# EAGLE board beeshield (EAGLE 6.5.0)
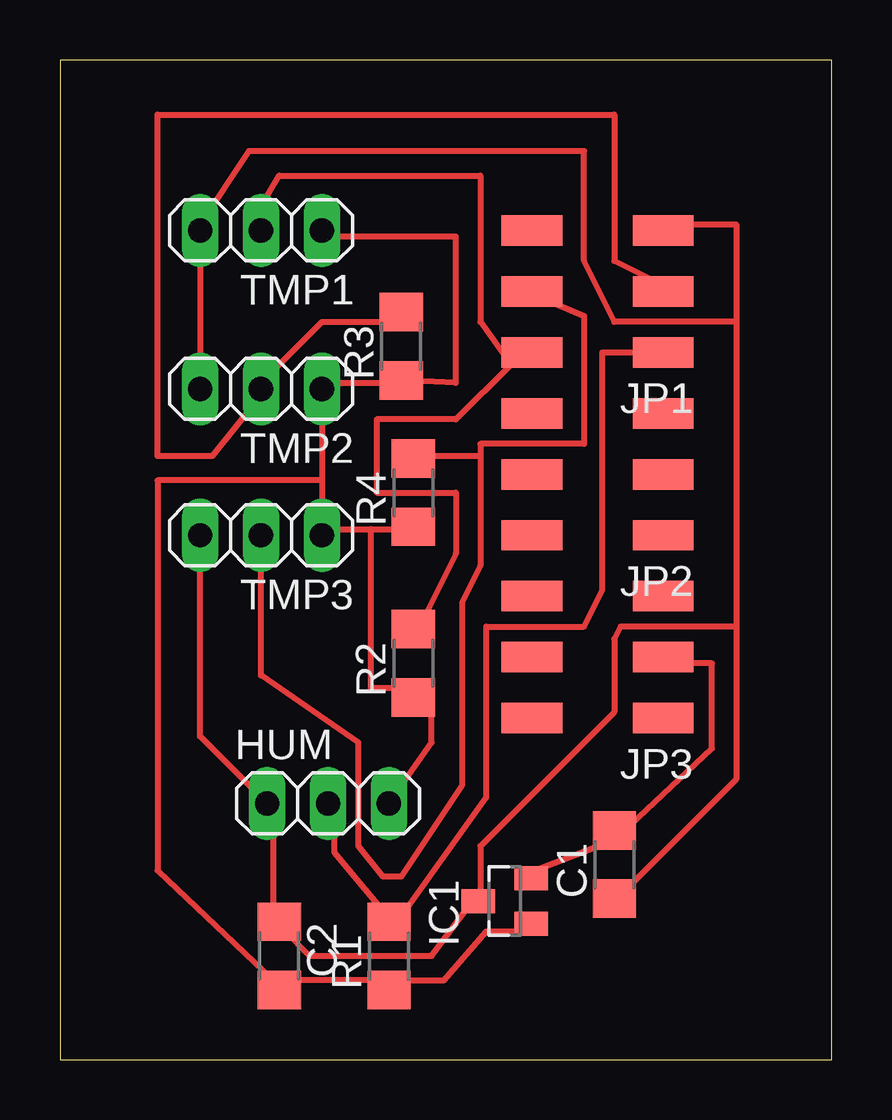
[diagram p0: board, top side]

Size 32.18 x 41.65 mm. Coordinates in mm from the lower left corner, seen from the top.
Outline: 0,0 32.18,0 32.18,41.65 0,41.65 0,0
Copper layers (1*16): Top 0.035mm / dielectric 1.5mm / Bottom 0.035mm
Design rules "default *": minimum track width 10mil, minimum drill 24mil, track to track 20mil, track to pad 8mil, pad to pad 8mil, via to via 8mil, smd to smd 8mil, copper to edge 40mil, drill to drill 8mil, minimum pad ring 10mil, minimum via ring 8mil, stop-mask expansion 4mil, vias tented up to drill 0mil, thermal gap 10mil

## Footprints (pad centres in the part's own frame; a part is rotated, then mirrored left to right if it is on the bottom)
1206 = smd 1.6 x 1.803: 1 -1.422,0; 2 1.422,0
1X03 = drill 1.016 long: 1 -2.54,0; 2 0,0; 3 2.54,0
SOT23 = smd 1 x 1.4: 1 -0.95,-1.1; 2 0.95,-1.1; 3 0,1.1
2X03SMD = smd 2.54 x 1.27: 1 -2.54,2.54; 2 2.92,2.54; 3 -2.54,0; 4 2.92,0; 5 -2.54,-2.54; 6 2.92,-2.54

## Placement (x,y rotation side)
C1  [1206]  23.11,8.13 90 top
C2  [1206]  9.14,4.32 270 top
HUM  [1X03]  11.18,10.67 0 top
IC1  [SOT23]  18.54,6.6 90 top
JP1  [2X03SMD]  22.61,32 180 top
JP2  [2X03SMD]  22.61,24.38 180 top
JP3  [2X03SMD]  22.61,16.76 180 top
R1  10k  [1206]  13.72,4.32 90 top
R2  4k7  [1206]  14.73,16.51 90 top
R3  4k7  [1206]  14.22,29.72 90 top
R4  4k7  [1206]  14.73,23.62 90 top
TMP1  [1X03]  8.38,34.54 180 top
TMP2  [1X03]  8.38,27.94 180 top
TMP3  [1X03]  8.38,21.84 180 top

## Library data of the parts
C1 C2 R1-R4 = FAB_Hello
HUM TMP1-TMP3 = pinhead
IC1 JP1-JP3 = fab

## Nets
GND: C1.1 C2.1 HUM.1 IC1.3 JP1.5 TMP1.3 TMP2.3 TMP3.3
IO0: HUM.2 JP1.1 R1.2
IO1: JP1.2 R2.2 TMP1.2
IO2: JP1.3 R3.2 TMP2.2
IO3: JP1.4 R4.2 TMP3.2
VBAT1: C1.2 IC1.2 JP3.3
VCC: C2.2 HUM.3 IC1.1 R1.1 R2.1 R3.1 R4.1 TMP1.1 TMP2.1 TMP3.1

## Tracks (layer width: path | path; a pad name or v marks a point on that pad's centre or on a via)
GND
  Top 0.254: TMP3.3 5.84,13.46 HUM.1 8.89,10.41 8.89,5.84 C2.1 9.4,5.33 10.41,4.32 15.49,4.32 17.02,6.35 IC1.3 17.53,6.86 17.53,8.89 23.11,14.48 23.11,17.53 23.37,18.03 28.19,18.03 | TMP2.3 TMP1.3 5.84,34.8 7.87,37.85 21.84,37.85 21.84,33.27 23.11,30.73 28.19,30.73 | 28.19,30.73 28.19,34.8 25.15,34.8 JP1.5 | 28.19,30.73 28.19,18.03 | 28.19,18.03 28.19,11.68 23.11,6.6 C1.1
IO0
  Top 0.254: 13.97,5.59 13.46,5.84 R1.2 13.97,5.59 | 13.97,5.59 11.43,8.64 11.43,10.41 HUM.2 | 13.97,5.59 17.78,10.92 17.78,18.03 21.84,18.03 22.61,19.56 22.61,29.46 JP1.1 25.15,29.21
IO1
  Top 0.254: 18.8,28.96 19.56,29.21 JP1.2 | 18.8,28.96 16.51,26.67 13.21,26.67 13.21,23.62 16.51,23.62 16.51,21.08 14.99,18.03 R2.2 14.73,17.78 | TMP1.2 8.38,35.56 9.14,36.83 17.53,36.83 17.53,30.73 18.8,28.96
IO2
  Top 0.254: R3.2 14.22,30.73 10.92,30.73 8.38,28.19 TMP2.2 8.38,27.69 6.35,25.15 4.06,25.15 4.06,39.37 23.11,39.37 23.11,33.27 25.15,32.26 JP1.3
IO3
  Top 0.254: 17.53,25.15 14.73,25.15 R4.2 | 17.53,25.15 17.53,25.65 21.84,25.65 21.84,30.99 20.07,31.75 JP1.4 | TMP3.2 8.38,16 12.45,13.21 12.45,8.89 13.46,7.62 14.22,7.62 16.76,11.43 16.76,19.05 17.53,20.57 17.53,25.15
VBAT1
  Top 0.254: 23.11,9.14 19.81,7.87 20.07,7.87 IC1.2 | 23.11,9.14 27.18,12.95 27.18,16.51 25.15,16.51 JP3.3 | 23.11,9.14 C1.2
VCC
  Top 0.254: IC1.1 19.56,5.33 17.78,5.33 16,3.3 13.97,3.3 R1.1 13.46,3.3 9.4,3.3 C2.2 8.89,3.3 4.06,7.87 4.06,24.13 10.92,24.13 | HUM.3 15.49,13.21 15.49,14.99 R2.1 15.49,15.49 12.95,15.49 12.95,22.1 | 10.92,22.1 12.95,22.1 | 12.95,22.1 15.49,22.1 R4.1 | TMP1.1 10.92,34.29 16.51,34.29 16.51,28.19 R3.1 14.22,28.19 10.92,28.19 TMP2.1 10.92,24.13 | 10.92,24.13 10.92,22.1 | 10.92,22.1 TMP3.1